# Allegro board PRACTICA2-3.brd
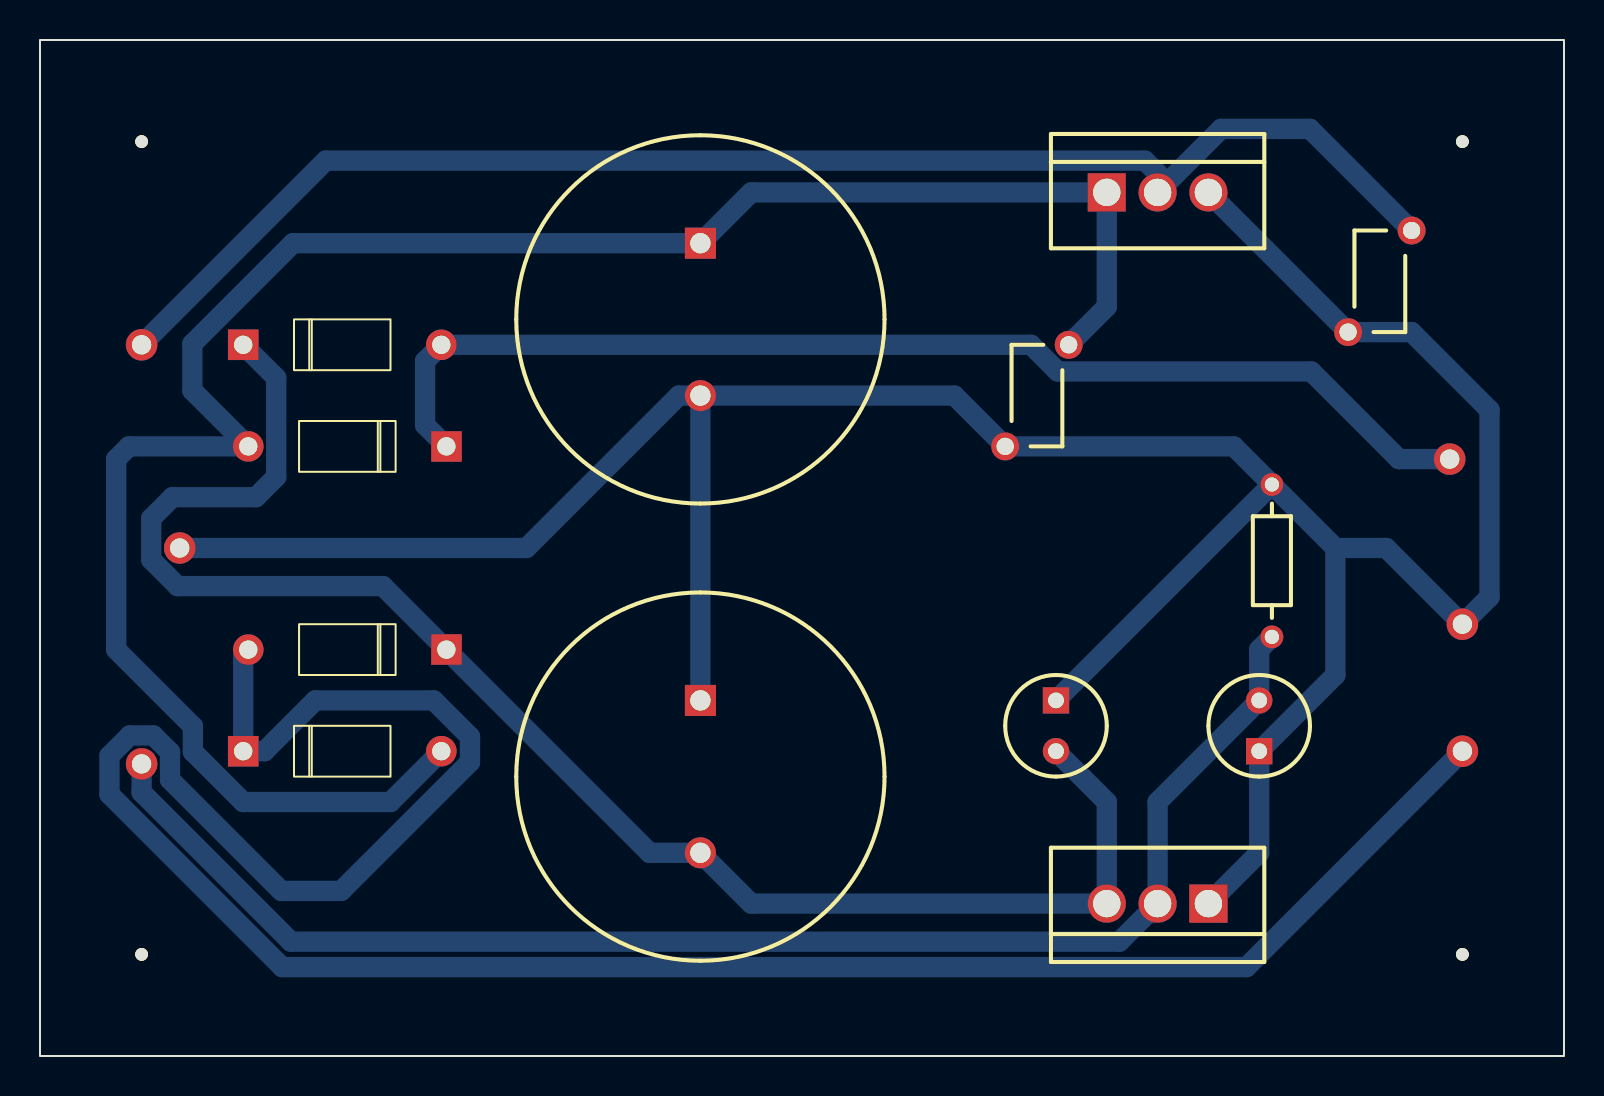
[diagram p0: board, top side]
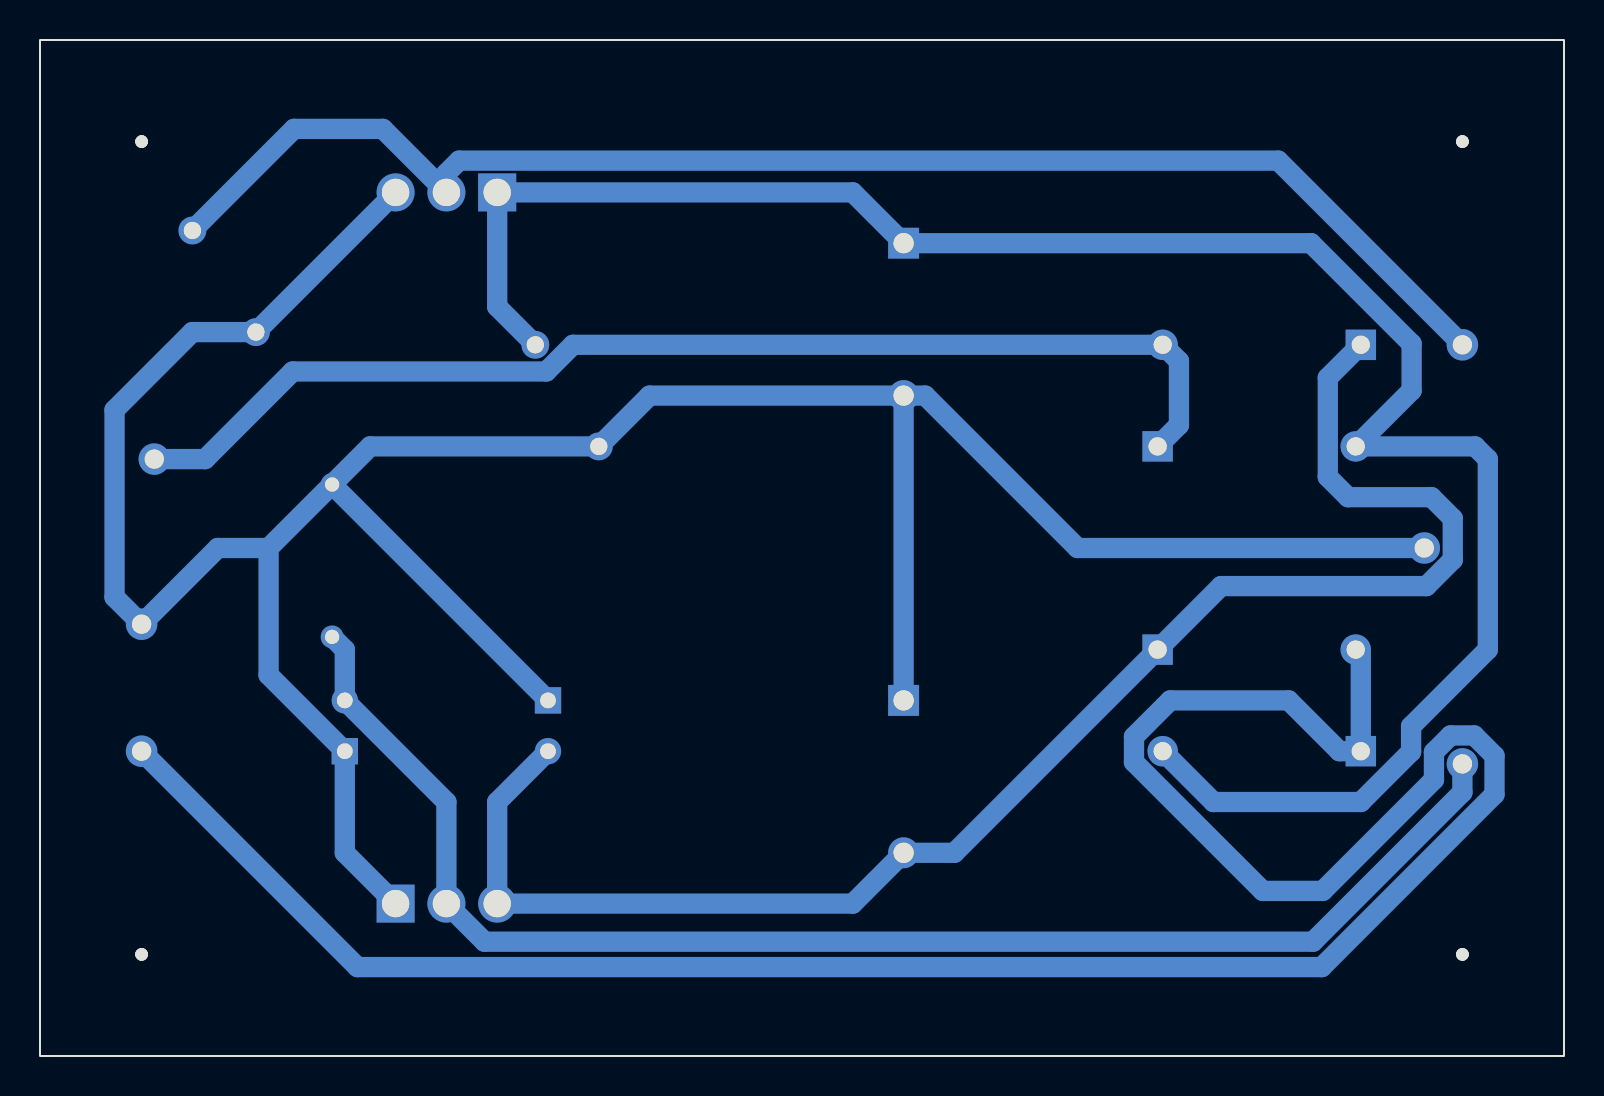
[diagram p1: board, bottom side, seen from below]

Outline 76.2 x 50.8 mm; copper layers: TOP, BOTTOM. Coordinates in mm from the lower left corner of the outline.
Outline path: rectangle 0,0 76.2,50.8

## Design rules (mm)
constraint set DEFAULT: min track width 0.127

## Placement (name value [footprint] x y rotation side)
C1  2200u  [CYLD725LS300040]  33.02 40.64 270 top
C2  2200u  [CYLD725LS300040]  33.02 17.78 270 top
C3  0.22u  [DISC200X100LS200X125034]  48.26 30.48 90 top
C4  2.2uF  [CYLD200LS100031]  50.8 17.78 270 top
C5  0.1u  [DISC200X100LS200X125034]  65.41 36.2 90 top
C6  1uF  [CYLD200LS100031]  60.96 15.24 90 top
D1  D1N4002  [DO41]  10.16 35.56 270 top
D2  D1N4002  [DO41]  20.32 30.48 90 top
D3  D1N4002  [DO41]  20.32 20.32 90 top
D4  D1N4002  [DO41]  10.16 15.24 270 top
J1  CON1  [TESTCOUP]  5.08 35.56 0 top
J2  CON1  [TESTCOUP]  6.99 25.4 0 top
J3  CON1  [TESTCOUP]  5.08 14.61 0 top
J4  CON1  [TESTCOUP]  70.48 29.84 0 top
J5  CON1  [TESTCOUP]  71.12 21.59 0 top
J6  CON1  [TESTCOUP]  71.12 15.24 0 top
NOREF  -  [unnamed]  71.12 45.72 0 top
NOREF#2  -  [unnamed]  71.12 5.08 0 top
NOREF#3  -  [unnamed]  5.08 5.08 0 top
NOREF#4  -  [unnamed]  5.08 45.72 0 top
R1  2.4k  [AXRC05]  61.59 28.57 270 top
U1  LM7812C  [TO220AB]  53.34 43.18 0 top
U2  LM7912C  [TO220AB]  58.42 7.62 180 top

## Library data of the parts
C1 C2 C4 C6 = C_elect_2
C3 C5 = C
D1-D4 = D1N4002
J1-J6 = CON1
R1 = R
U1 = LM7812C
U2 = LM7912C

## Footprints (pads in the part's own frame, mm; a bottom-side part is the same pattern mirrored in y, then rotated)
AXRC05
  round 1.143 hole 0.711: 1(0,0) 2(7.62,0)
CYLD200LS100031
  rect 1.321x1.321 hole 0.787: 1(0,0)
  round 1.321 hole 0.787: 2(2.54,0)
CYLD725LS300040
  rect 1.549x1.549 hole 1.016: 1(0,0)
  round 1.549 hole 1.016: 2(7.62,0)
DISC200X100LS200X125034
  round 1.397 hole 0.864: 1(0,0) 2(5.08,-3.175)
DO41
  rect 1.524x1.524 hole 0.914: 1(0,0)
  round 1.524 hole 0.914: 2(0,9.906)
TESTCOUP
  round 1.575 hole 0.965: 1(0,0)
TO220AB
  rect 1.905x1.905 hole 1.372: 1(0,0)
  round 1.905 hole 1.372: 2(2.54,0) 3(5.08,0)
unnamed
  round 0.635 hole 3.175 unplated: (0,0)

## Nets
0: C1.2(-) C2.1 C3.1 C4.1 C5.1 C6.1 J2.1 J5.1 R1.1 U1.3 U2.1
N1: D1.2 D2.1 J4.1
N2: D3.2 D4.1 J6.1
N3: C1.1 C3.2 D2.2 D4.2 U1.1
N4: C2.2(-) C4.2(-) D1.1 D3.1 U2.3
N5: C5.2 J1.1 U1.2(OUT)
N6: C6.2(-) J3.1 R1.2 U2.2(OUT)

## Routing (per net, layer and track width the routed paths; a pad name or vN(x,y) marks a point on that pad's centre or on a via; arc(x,y) is an arc through that point)
0: length 152.8
  BOTTOM w1.016: C2.1 C1.2 ; C1.2 31.94,33.02 24.32,25.4 J2.1 ; C1.2 45.72,33.02 C3.1 59.69,30.48 R1.1 ; 64.77,25.4 67.31,25.4 J5.1 72.47,22.94 72.47,32.3 68.58,36.2 C5.1 U1.3 ; 64.77,25.4 64.77,19.05 C6.1 60.96,10.16 U2.1 ; 64.77,25.4 R1.1 ; C4.1 R1.1
N1: length 58.6
  BOTTOM w1.016: D2.1 19.25,31.55 19.25,34.75 D1.2 49.55,35.56 50.88,34.23 63.56,34.23 67.94,29.84 J4.1
N2: length 122.4
  BOTTOM w1.016: D3.2 10.16,20.07 D4.1 11.23,15.24 13.77,17.78 19.68,17.78 21.5,15.96 21.5,14.69 15.06,8.26 12.06,8.26 6.5,13.82 6.5,15.19 5.67,16.03 4.49,16.03 3.47,15.01 3.47,13.08 12.11,4.45 60.33,4.45 J6.1
N3: length 101.2
  BOTTOM w1.016: 51.44,35.56 53.34,37.47 U1.1 35.56,43.18 C1.1 12.65,40.64 7.62,35.61 7.62,33.27 D2.2 4.45,30.48 3.81,29.84 3.81,20.32 7.65,16.48 7.65,15.21 10.16,12.7 17.53,12.7 D4.2
N4: length 80
  BOTTOM w1.016: D1.1 11.81,33.91 11.81,28.96 10.79,27.94 6.62,27.94 5.56,26.88 5.56,24.81 6.88,23.5 17.14,23.5 D3.1 30.48,10.16 C2.2 35.56,7.62 U2.3 53.34,12.7 C4.2
N5: length 71.9
  BOTTOM w1.016: J1.1 14.29,44.77 55.24,44.77 55.88,44.13 U1.2 59.05,46.35 63.5,46.35 C5.2
N6: length 71.8
  BOTTOM w1.016: J3.1 5.08,13.18 12.55,5.71 53.98,5.71 U2.2 55.88,12.7 C6.2 60.96,20.32 R1.2
